# Altium PCB Solar MPPT Charge Controller.PcbDoc
Units mil, origin at the board's own origin, x right, y up, seen from the top; angles counter-clockwise.
Board outline 6000 x 4000 mil, 2 copper layers (Top Layer, Bottom Layer); 83 components, 52 nets, 234 pads, 6 vias.
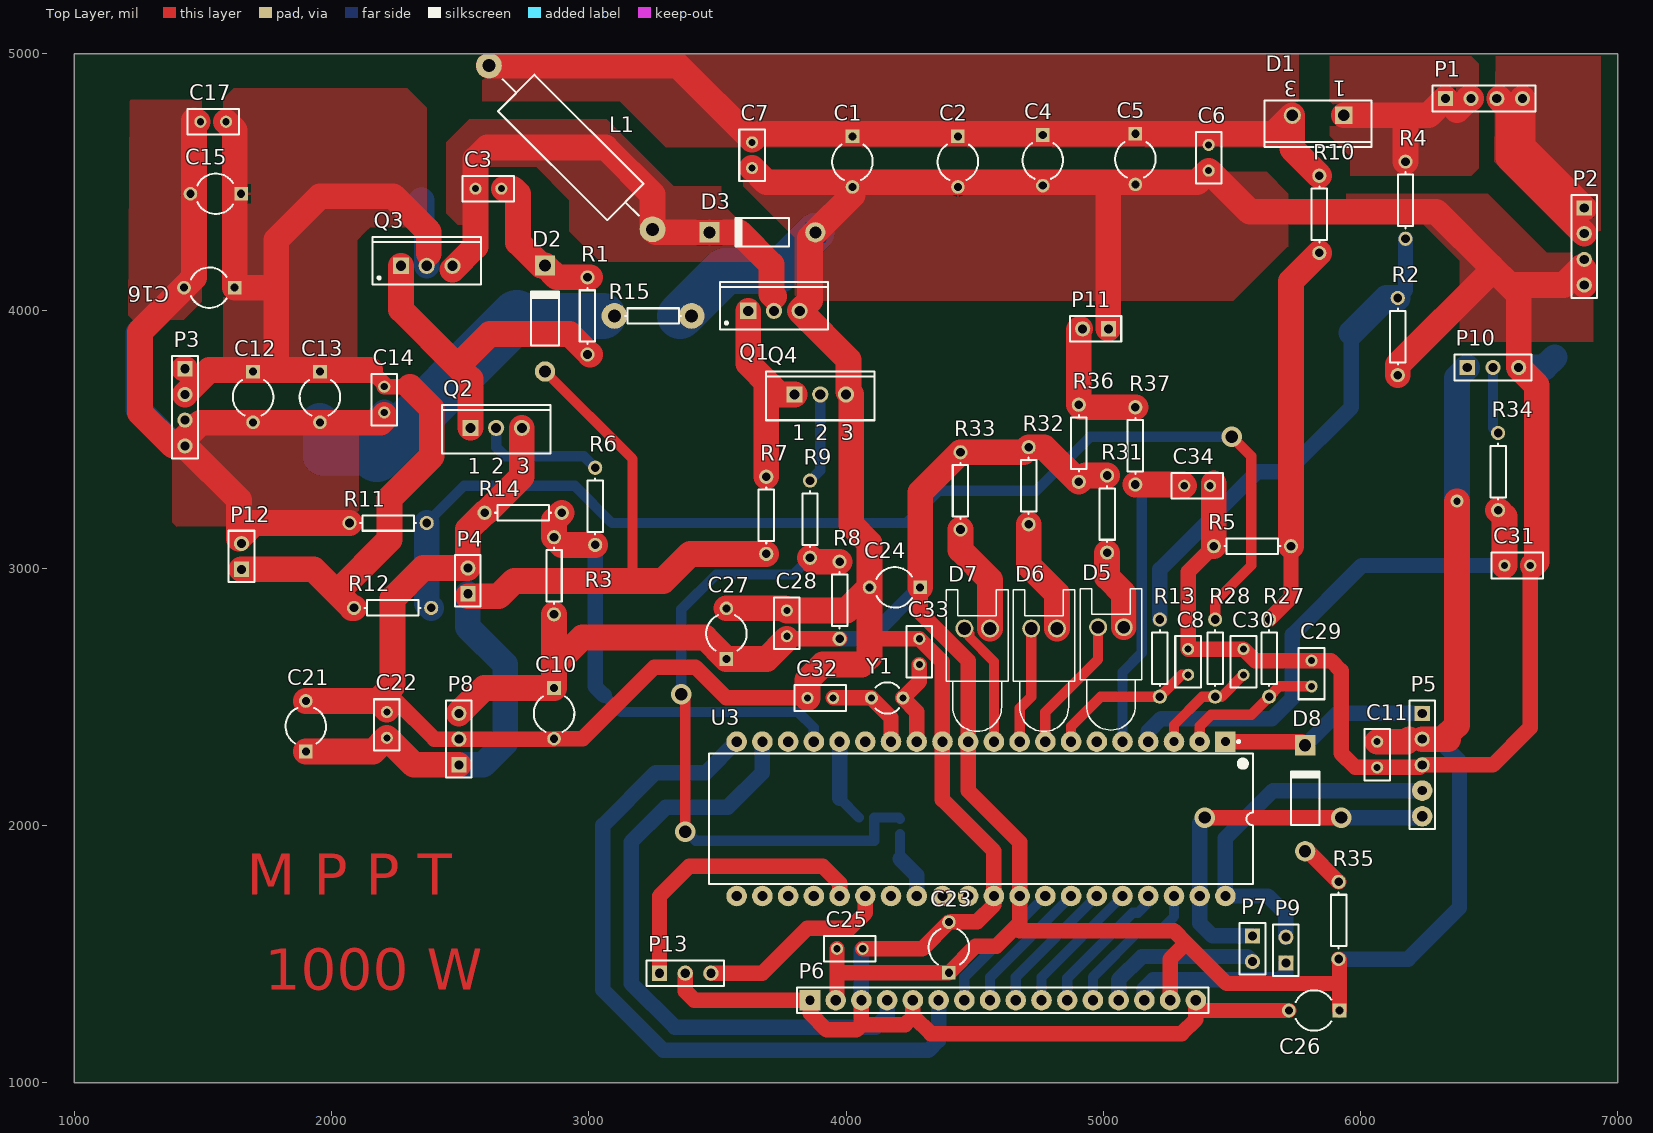
[diagram p0: Top Layer view]
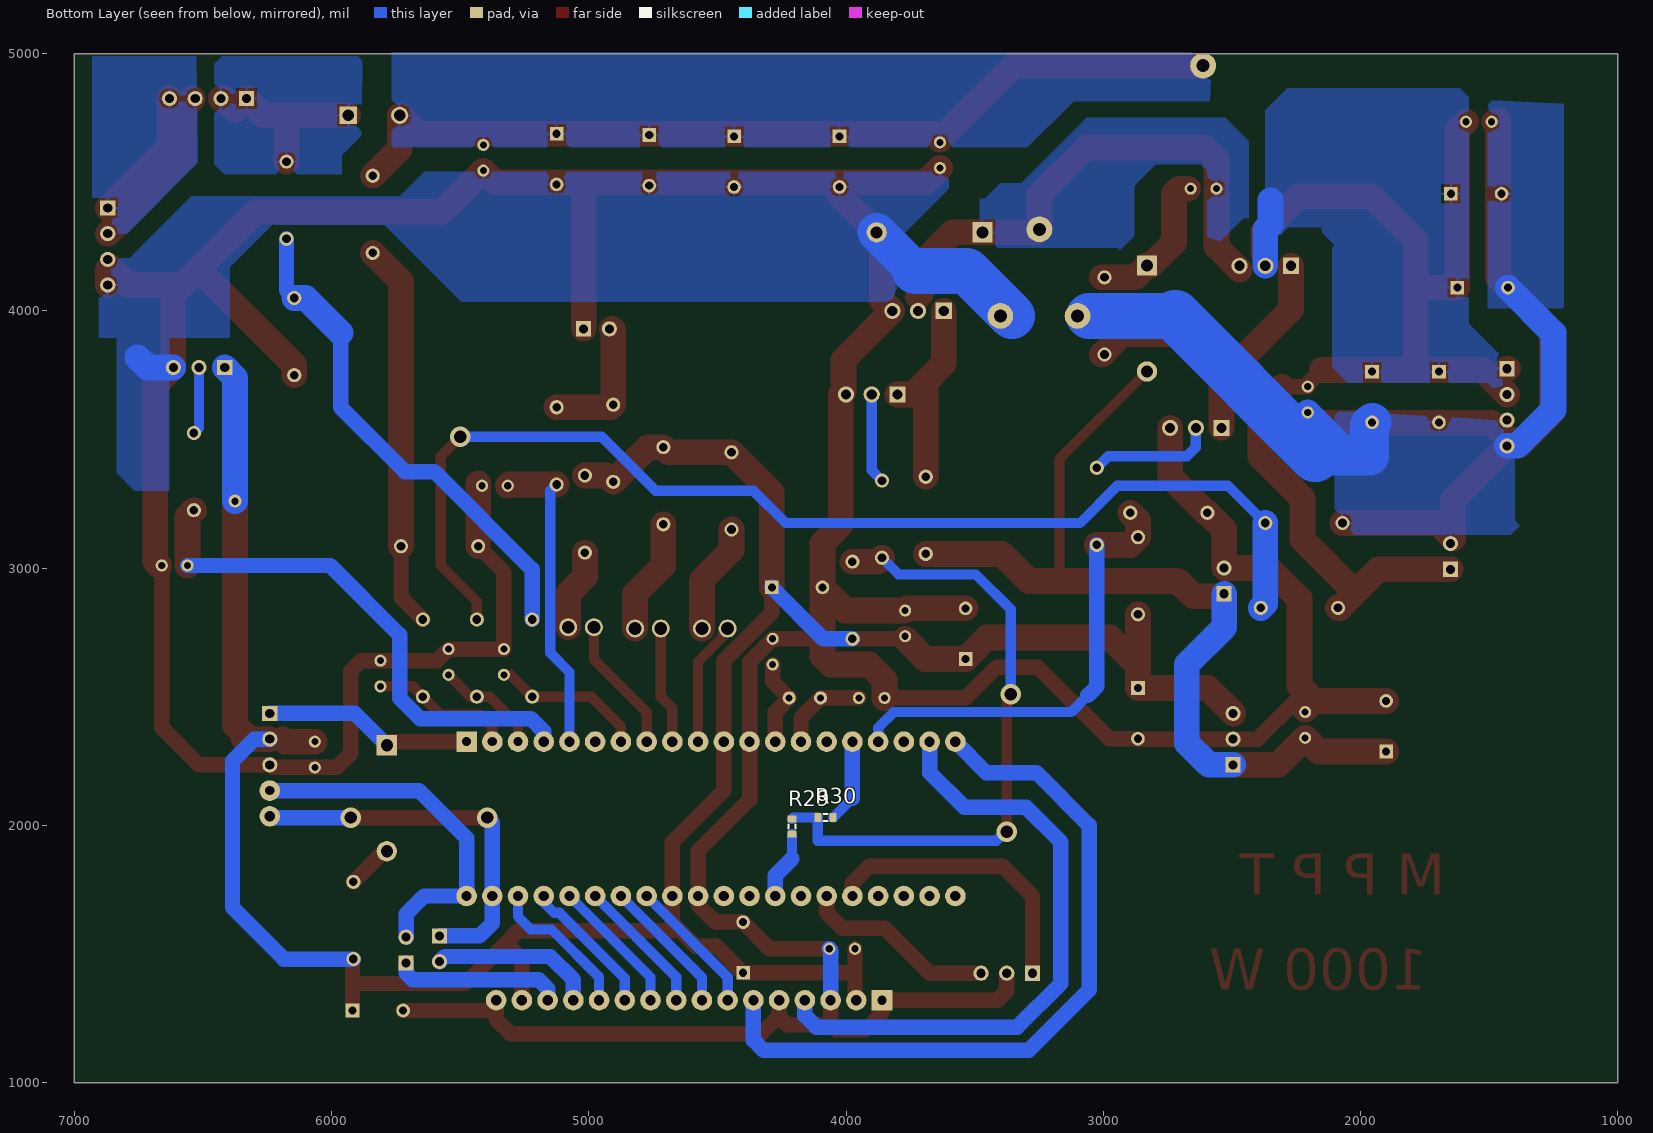
[diagram p1: Bottom Layer view, seen from below]

## Layer stack, top to bottom
Top Solder: solder mask 0.4, Solder Resist, Dk 3.5
Top Layer: signal copper 1.4
Dielectric 1: dielectric 12.6, FR-4, Dk 4.8
Bottom Layer: signal copper 1.4
Bottom Solder: solder mask 0.4, Solder Resist, Dk 3.5

## Board outline
1000,1000 7000,1000 7000,5000 1000,5000

## Design rules (kind name [scope] priority, off if disabled: settings)
Clearance [All] p1: gap=10
PolygonConnect [All] p1: connectstyle=Relief reliefconductorwidth=10 reliefentries=4 polygonreliefangle="90 Angle" airgapwidth=10
RoutingVias [All] p1: holewidth=28 width=50 viastyle="Through Hole" minholewidth=28 minwidth=50 maxholewidth=28 maxwidth=50
SolderMaskExpansion [All] p1: expansion=4
Width [All] p1: maxlimit=200 minlimit=10 preferedwidth=100 minimp=50.000000 maximp=50.000000 favimp=50.000000
29 further rules are at their usual default settings.

## Classes and differential pairs
component class BUCK_Converter: C1 C2 C3 C4 C5 C6 C7 D1 D2 D3 L1 Q1 Q2 Q3 Q4 R1 R2 R3 R4 R5 R6 R7 R8 R9 R10 R14
component class Controller: C8 C23 C24 C25 C26 C27 C28 C29 C30 C31 C32 C33 C34 D5 D6 D7 D8 P5 P6 P7 P9 P10 P11 P13 R13 R27 R28 R29 R30 R31 R32 R33 R34 R35 R36 R37 U3 Y1
component class Main: P1 P2 P3 R11 R12
component class POWER: C10 C11 C12 C13 C14 C15 C16 C17 C21 C22 P4 P8 P12 R15

## Components (designator, comment, footprint, x,y, rotation, side; value= is the part's Value field where it differs from the comment)
C1 "Cap2" CAPR5-4X5 4025,4580 r270 top
C2 "Cap2" CAPR5-4X5 4435,4580 r270 top
C3 "Cap" RAD-0.1 2610,4475 r0 top
C4 "Cap2" CAPR5-4X5 4765,4585 r270 top
C5 "Cap2" CAPR5-4X5 5125,4590 r270 top
C6 "Cap" RAD-0.1 5410,4595 r90 top
C7 "Cap" RAD-0.1 3635,4605 r90 top
C8 "Cap" RAD-0.1 5330,2635 r90 top
C10 "Cap2" CAPR5-4X5 2865,2435 r270 top
C11 "Cap" RAD-0.1 6065,2275 r90 top
C12 "Cap2" CAPR5-4X5 1695,3665 r270 top
C13 "Cap2" CAPR5-4X5 1955,3665 r270 top
C14 "Cap" RAD-0.1 2205,3655 r90 top
C15 "Cap2" CAPR5-4X5 1550,4455 r180 top
C16 "Cap2" CAPR5-4X5 1525,4090 r180 top
C17 "Cap" RAD-0.1 1540,4735 r0 top
C21 "Cap2" CAPR5-4X5 1900,2385 r90 top
C22 "Cap" RAD-0.1 2215,2390 r270 top
C23 "Cap2" CAPR5-4X5 4400,1525 r90 top
C24 "Cap2" CAPR5-4X5 4190,2925 r180 top
C25 "Cap" RAD-0.1 4015,1520 r180 top
C26 "Cap2" CAPR5-4X5 5820,1280 r180 top
C27 "Cap2" CAPR5-4X5 3535,2745 r90 top
C28 "Cap" RAD-0.1 3770,2785 r270 top
C29 "Cap" RAD-0.1 5810,2590 r270 top
C30 "Cap" RAD-0.1 5545,2635 r90 top
C31 "Cap" RAD-0.1 6610,3010 r0 top
C32 "Cap" RAD-0.1 3900,2495 r0 top
C33 "Cap" RAD-0.1 4285,2675 r270 top
C34 "Cap" RAD-0.1 5365,3320 r180 top
D1 "Diode 10TQ045" TO-220AC 5835,4760 r180 top
D2 "Diode 11DQ03" DO-204AL 2830,3970 r90 top
D3 "Diode 11DQ03" DO-204AL 3675,4305 r180 top
D5 "LED0" LED-0 5030,2770 r0 top
D6 "LED0" LED-0 4770,2765 r0 top
D7 "LED0" LED-0 4510,2765 r0 top
D8 "Diode 11DQ03" DO-204AL 5785,2105 r90 top
L1 "Inductor Iron" AXIAL-0.9 2930,4635 r135 top
P1 "Current Sensor" HDR1X4 6330,4825 r0 top
P2 "Header 4" HDR1X4 6870,4400 r270 top
P3 "Header 4" HDR1X4 1430,3775 r270 top
P4 "AdapterOutput" HDR1X2 2530,2900 r90 top
P5 "ICSP" HDR1X5 6240,2435 r270 top
P6 "LCD" HDR1X16 3860,1320 r0 top
P7 "Header 2" HDR1X2 5580,1570 r270 top
P8 "LM7805" HDR1X3 2495,2235 r90 top
P9 "Header 2" HDR1X2 5710,1465 r90 top
P10 "CURRENT" HDR1X3 6415,3780 r0 top
P11 "Header 2" HDR1X2 5020,3930 r180 top
P12 "AdapterInput" HDR1X2 1650,2995 r90 top
P13 "UART" HDR1X3 3275,1425 r0 top
Q1 "IRF3808" TO-220AB 3720,4000 r0 top
Q2 "NPN" TO-220-AB 2640,3545 r0 top
Q3 "IRF3808" TO-220AB 2370,4175 r0 top
Q4 "NPN" TO-220-AB 3900,3675 r0 top
R1 "Res1" AXIAL-0.3#1 2995,3980 r90 top
R2 "Res1" AXIAL-0.3#1 6145,3900 r90 top
R3 "Res1" AXIAL-0.3#1 2865,2970 r270 top
R4 "Res1" AXIAL-0.3#1 6175,4430 r270 top
R5 "Res1" AXIAL-0.3#1 5580,3085 r0 top
R6 "Res1" AXIAL-0.3#1 3025,3240 r270 top
R7 "Res1" AXIAL-0.3#1 3690,3205 r270 top
R8 "Res1" AXIAL-0.3#1 3975,2875 r270 top
R9 "Res1" AXIAL-0.3#1 3860,3190 r270 top
R10 "Res1" AXIAL-0.3#1 5840,4375 r270 top
R11 "Res1" AXIAL-0.3#1 2220,3175 r180 top
R12 "Res1" AXIAL-0.3#1 2237.44,2845 r180 top
R13 "Res1" AXIAL-0.3#1 5220,2650 r90 top
R14 "Res1" AXIAL-0.3#1 2745,3215 r0 top
R15 "Res1" AXIAL-0.3#2 3250,3980 r0 top
R27 "Res1" AXIAL-0.3#1 5645,2650 r90 top
R28 "Res1" AXIAL-0.3#1 5435,2650 r90 top
R29 "Res3" J1-0603 4210,1995 r270 bottom
R30 "Res3" J1-0603 4080,2030 r0 bottom
R31 "Res1" AXIAL-0.3#1 5015,3210 r90 top
R32 "Res1" AXIAL-0.3#1 4710,3320 r90 top
R33 "Res1" AXIAL-0.3#1 4445,3300 r90 top
R34 "Res1" AXIAL-0.3#1 6535,3375 r270 top
R35 "Res1" AXIAL-0.3#1 5915,1630 r90 top
R36 "Res1" AXIAL-0.3#1 4905,3485 r90 top
R37 "Res1" AXIAL-0.3#1 5125,3475 r90 top
U3 "PIC16F887-I/P" PDIP600-P40 4525,2025 r270 top
Y1 "20MHz" R38 4160,2495 r90 top

## Footprints (in the part's own frame and the unit in brackets; to place one, negate y for a bottom-side part, rotate by r counter-clockwise, add the part's x,y. Pads: shape width x height; smd on the part's side, far side on the other; paste and mask are expansions set on the pad)
AXIAL-0.3#1 [mm] "Axial Device, Thru-Hole; 2 Leads; 0.3 in Pin Spacing"
  round 1.4 hole 0.85: 1(-3.81,0) 2(3.81,0)
  silkscreen extent -2.77,-0.76 2.77,0.76
AXIAL-0.3#2 [mm] "Axial Device, Thru-Hole; 2 Leads; 0.3 in Pin Spacing"
  round 2.54 hole 1.27: 1(-3.81,0) 2(3.81,0)
  silkscreen extent -2.77,-0.76 2.77,0.76
AXIAL-0.9 [mil] "Axial Device, Thru-Hole; 2 Leads; 0.9 in Pin Spacing"
  round 100 hole 50: 1(-450,0) 2(450,0)
  silkscreen extent -375,-100 375,100
CAPR5-4X5 [mm] "Capacitor; 2 Leads"
  rect 1.35x1.35 hole 0.8: 1(-2.5,0)
  round 1.35 hole 0.8: 2(2.5,0)
  silkscreen extent -1.69,-2 1.82,2
DO-204AL [mm] "Diode, Axial; Body 5.2 x 2.7 mm (LxDia. max), Lead Dia. 0.86 mm (max)"
  round 2 hole 1.2: 1(-5.23,0)
  rect 2x2 hole 1.2: 2(5.23,0)
  silkscreen extent -2.65,-1.4 2.75,1.4
HDR1X2 [mm] "Connector; Header; 2 Position"
  rect 1.5x1.5 hole 0.9: 1(0,0)
  round 1.5 hole 0.9: 2(2.54,0)
  silkscreen extent -1.27,-1.27 3.81,1.27
HDR1X3 [mm] "Connector; Header; 3 Position"
  rect 1.5x1.5 hole 0.9: 1(0,0)
  round 1.5 hole 0.9: 2(2.54,0) 3(5.08,0)
  silkscreen extent -1.27,-1.27 6.35,1.27
HDR1X4 [mm] "Connector; Header; 4 Position"
  rect 1.5x1.5 hole 0.9: 1(0,0)
  round 1.5 hole 0.9: 2(2.54,0) 3(5.08,0) 4(7.62,0)
  silkscreen extent -1.27,-1.27 8.89,1.27
HDR1X5 [mm] "Connector; Header; 5 Position"
  rect 1.5x1.5 hole 0.9: 1(0,0)
  round 1.5 hole 0.9: 2(2.54,0) 3(5.08,0)
  round 2.032 hole 0.9: 4(7.62,0)
  round 2.032 hole 1.016: 5(10.16,0)
  silkscreen extent -1.27,-1.27 11.43,1.27
HDR1X16 [mil] "Connector; Header; 16 Position"
  rect 80x80 hole 35.43: 1(0,0)
  round 80 hole 40: 2(100,0) 3(200,0) 4(300,0) 5(400,0) 6(500,0) 7(600,0) 8(700,0) 9(800,0) 10(900,0) 11(1000,0) 12(1100,0) 13(1200,0) 14(1300,0) 15(1400,0) 16(1500,0)
  silkscreen extent -50,-50 1550,50
J1-0603 [mm] "Chip Resistor, Body 1.6x0.8mm, IPC High Density"
  rect 0.7x0.9 smd: 1(-0.75,0) 2(0.75,0)
  silkscreen extent -0.2,-0.35 0.2,0.35, body extent -0.85,-0.48 0.85,0.48, height 0.9
LED-0 [mil] "LED; 2 Leads"
  round 70 hole 50: 1(50,0) 2(-50,0)
  silkscreen extent -120,-400 120,150
PDIP600-P40 [mil] "DIP, 40-Leads, Row Spacing 15.24mm, Pitch 2.54mm, Body 51.8x13.5mm"
  rect 80.06x80.06 hole 35.43: 1(-300,950)
  oval 80x80.06 hole 35.43: 2(-300,850)
  round 80 hole 35.43: 3(-300,750)
  round 80 hole 40: 4(-300,650) 6(-300,450) 7(-300,350) 8(-300,250) 9(-300,150) 10(-300,50) 11(-300,-50) 12(-300,-150) 13(-300,-250) 14(-300,-350) 15(-300,-450) 16(-300,-550) 17(-300,-650) 18(-300,-750) 19(-300,-850) 20(-300,-950) 21(300,-950) 22(300,-850) 23(300,-750) 24(300,-650) 25(300,-550) 26(300,-450) 27(300,-350) 28(300,-250) 29(300,-150) 30(300,-50) 31(300,50) 32(300,150) 33(300,250) 34(300,350) 35(300,450) 36(300,550) 37(300,650) 38(300,750) 39(300,850) 40(300,950)
  oval 80.06x80 hole 40: 5(-300,550)
  silkscreen extent -305,-1057 254,1057, body extent -287,-1057 287,1057, height 250
R38 [mm] "Crystal, Thru-Hole; 2 Leads; Body 3.1 x 8.2 mm (Dia.xH)"
  round 1.3 hole 0.7: 1(0,1.55) 2(0,-1.55)
  silkscreen extent -1.55,-1.19 1.55,1.17
RAD-0.1 [mm] "Radial Cap, Thru-Hole; 2 Leads; 0.1 in Pin Spacing"
  round 1.2 hole 0.7: 1(-1.27,0) 2(1.27,0)
  silkscreen extent -2.54,-1.27 2.54,1.27
TO-220-AB [mm] "TO, Thru-Hole, Vertical, Heatsink Mounted; 3 In-Line Leads; Pitch 2.54 mm"
  rect 1.6x1.6 hole 1: 1(-2.54,0)
  round 1.6 hole 1: 2(0,0) 3(2.54,0)
  silkscreen extent -5.35,-2.55 5.35,2.25
TO-220AB [mm] "TO, Thru-Hole, Vertical, Heatsink Mounted; 3 In-Line Leads; Pitch 2.54 mm"
  rect 1.6x1.6 hole 1: 1(-2.54,0)
  round 1.6 hole 1: 2(0,0) 3(2.54,0)
  silkscreen extent -5.35,-1.85 5.35,2.85, body extent -5.4,-1.9 5.4,2.9, height 19.3
TO-220AC [mm] "TO, Thru-Hole, Vertical, Heatsink Mounted; 3 In-Line Leads (1 Absent); Pitch 2.54 mm"
  rect 1.7x1.7 hole 1.1: 1(-2.54,0)
  round 1.7 hole 1.1: 3(2.54,0)
  silkscreen extent -5.3,-1.45 5.3,3.15

## Part data
C1 C2 C3 C4 C5 C6 C7 C8 C10 C11 C12 C13 C14 C15 C16 C17 C21 C22 C23 C24 C25 C26 C27 C28 C29 C30 C31 C32 C33 C34: "Capacitor"
D1 D2 D3 D8: "Schottky Rectifier"
D5 D6 D7: "Typical INFRARED GaAs LED"
L1: "Magnetic-Core Inductor"
P1: library part "Header 4", "Header, 4-Pin"
P2 P3: "Header, 4-Pin"
P4 P12: library part "Header 2", "Header, 2-Pin"
P5: library part "Header 5", "Header, 5-Pin"
P6: library part "Header 16", "Header, 16-Pin"
P7 P9 P11: "Header, 2-Pin"
P8 P10 P13: library part "Header 3", "Header, 3-Pin"
Q1 Q3: library part NMOS-2, "N-Channel Power MOSFET"
Q2 Q4: "NPN Bipolar Transistor"
R1 R2 R3 R4 R5 R6 R7 R8 R9 R10 R11 R12 R13 R14 R15 R27 R28 R29 R30 R31 R32 R33 R34 R35 R36 R37: "Resistor"
U3: "Flash-Based, 8-Bit CMOS Microcontroller with nanoWatt Technology, 8K (x14-Bit words) Program Memory, 624 Bytes Data Memory, 35 I/O pins, 40-Pin PDIP, Standard VDD Range, Industrial Temperature"
Y1: library part XTAL, "Crystal Oscillator"

## Via types
v1: diameter 80, hole 48, Top Layer to Bottom Layer, 5 vias
v2: diameter 50, hole 28, Top Layer to Bottom Layer, 1 vias

## Nets (pads, with @x,y where several pads share a name; then routed paths per layer and width w, separated by ;. In a path a pad name is that pad's centre, name@x,y a point inside that pad or via, vN(x,y) a via of type N, cw(c..) or ccw(c..) an arc to the next point about the centre after c; other vN are vias at no path point)
5V: C10.1 C11.2 C23.1 C24.1 C25.2 C26.1 C27.1 C28.2 P5.2 P6.2 P6.15 P8.3 P10.1 R3.2 R8.2 R31.2 R32.2 R33.2 R35.1 R36.1 U3.11 U3.32 | length 10829.1
  Top Layer w60: C28.2 3780,2725 R8.2 ; P6.2 3965,1325 3965,1425 ; C25.2 3965,1425 ; C24.1 4288.43,2826.57 4475,2640 U3.11 4475,2135 4675,1935 U3.32 4675,1590 5275,1590 5322.5,1542.5 ; 4675,1620 4585,1530 4503.43,1530 C23.1 3966.57,1426.57 3965,1425 ; P6.15 5260,1480 5322.5,1542.5 ; R35.1 5918.43,1476.57 5918.43,1385 ; C26.1 5918.43,1385 ; 5322.5,1542.5 5480,1385 5918.43,1385
  Top Layer w100: P8.3 2593.43,2533.43 C10.1 2865,2620 ; R3.2 2865,2620 ; C28.2@3770,2725 3691.57,2646.57 C27.1 3451.57,2730 2975,2730 2865,2620 ; C24.1 4288.43,3293.43 R33.2 4690,3450 R32.2 4770,3470 R36.1 4930,3360 R31.2 ; C11.2 6180,2325 6190,2335 ; P5.2 6340,2335 6340,2355 6375,2390 v2(6375,3260)
  Bottom Layer w60: R8.2 4088.43,2725 C24.1 ; R35.1 6185,1480 6385,1680 6385,2250 6300,2335 P5.2
  Bottom Layer w100: v2(6375,3260) 6375,3740 P10.1
12VOUT: C21.1 C22.2 D2.1 P4.1 P8.1 R7.2 | length 3701.2
  Top Layer w40: D2.1 3170,3424.09 3170,2955 3175,2950
  Top Layer w100: C21.1 2161.57,2286.57 C22.2 2320,2235 P8.1 ; P4.1@2530,2890 2650,2890 2710,2950 3175,2950 3290,2950 3395,3055 R7.2
  Bottom Layer w100: P8.1 2590,2235 2675,2320 2675,2625 2530,2770 P4.1
B_VFB: C8.1 R13.1 U3.7 | length 597.8
  Top Layer w40: U3.7 4875,2385 4990,2500 R13.1 5305,2585 C8.1
D0: P6.7 U3.33 | length 535.5
  Bottom Layer w40: P6.7 4460,1410 U3.33
D1: P6.8 U3.34 | length 535.5
  Bottom Layer w40: P6.8 4560,1410 U3.34
D2: P6.9 U3.35 | length 535.5
  Bottom Layer w40: P6.9 4660,1410 U3.35
D3: P6.10 U3.36 | length 535.5
  Bottom Layer w40: P6.10 4760,1410 U3.36
D4: P6.11 U3.37 | length 547.2
  Bottom Layer w40: P6.11 4860,1405 5115,1660 5135,1660 5175,1700 U3.37
D5: P6.12 U3.38 | length 582.3
  Bottom Layer w40: P6.12 4960,1410 5145,1595 5225,1595 5275,1645 U3.38
D6: P6.13 P7.2 | length 645.6
  Bottom Layer w60: P6.13 5060,1400 5150,1490 5560,1490 P7.2
D7: P6.14 P9.1 | length 659.9
  Bottom Layer w60: P6.14 5160,1365 5195,1400 5685,1400 5710,1425 P9.1
E: P6.6 U3.20 | length 2868.5
  Bottom Layer w60: U3.20 3455,2205 3260,2205 3055,2000 3055,1360 3290,1125 4320,1125 4360,1165 P6.6
GND: C1.2 C2.2 C4.2 C5.2 C6.1 C7.1 C8.2 C10.2 C11.1 C21.2 C22.1 C23.2 C24.2 C25.1 C26.2 C27.2 C28.1 C29.1 C30.2 C31.2 C32.1 C33.1 C34.1 D3.1 P2.3 P2.4 P4.2 P5.3 P6.1 P6.3 P6.5 P6.16 P8.2 P10.3 P11.1 P13.2 Q1.3 Q2.3 Q4.3 R2.1 R5.1 R14.1 R15.2 U3.12 U3.31 | length 21520
  Top Layer w60: 2181.57,2483.43 2251.57,2483.43 2400,2335 P8.2 2863.43,2335 C10.2 2976.57,2336.57 3255,2615 3415,2615 3535,2495 C32.1 ; P13.2 3375,1355 3410,1320 P6.1 3860,1270 3925,1205 4040,1205 4060,1225 ; P6.3 4060,1225 ; C25.1 4296.57,1520 C23.2 ; 4091.57,2738.43 4105,2725 C33.1 4375,2635 U3.12 4375,2100 4575,1900 U3.31 4575,1690 4510,1625 C23.2@4410,1625 ; P6.5 4260,1255 ; R5.1 5330,2985 C8.2 C30.2 5590,2640 C29.1 5885,2640 5925,2600 5925,2280 5980,2225 C11.1 6230,2225 P5.3 6515,2235 6660,2380 C31.2 ; C26.2 5362.5,1280 5360,1282.5 5360,1245 5305,1190 4330,1190 4265,1255 4260,1255 ; 4060,1225 4230,1225 4260,1255
  Top Layer w100: C22.1@2215,2450 2181.57,2483.43 C21.2 2178.43,2483.43 2237.44,2542.44 2237.44,2881.27 2356.17,3000 P4.2 2530,3150 R14.1 2600,3215 2740,3355 Q2.3 ; C27.2 3761.57,2843.43 C28.1 4001.57,2835 C24.2 ; C7.1 3690,4500 5010,4500 ; C32.1 3850,2565 3910,2625 4060,2625 4091.57,2656.57 C24.2 ; C1.2 4025,4449.09 D3.1 3860,4284.09 3860,4040 Q1.3 4010,3810 4010,3685 4020,3675 4020,3168.43 4091.57,3096.85 C24.2 ; P11.1 5020,4490 5010,4500 ; R5.1 C34.1@5430,3330 ; R2.1 6145,3790 6507.5,4152.5 6507.5,4172.5 ; C31.2@6670,3010 6685,3025 6685,3710 P10.3 6615,4065 6580,4100 ; P2.4 6870,4160 6860,4170 6790,4100 6580,4100 ; 5010,4500 5365,4500 C6.1 5570,4385 6295,4385 6507.5,4172.5 ; 6507.5,4172.5 6580,4100
  Bottom Layer w60: P6.3 4060,1515 C25.1
  Bottom Layer w100: P10.3 6715,3780 6755,3820
  Bottom Layer w150: 3730.91,4155 D3.1
  Bottom Layer w180: R15.2@3355,3980 3530,4155 3730.91,4155
I_VFB: C30.1 R28.1 U3.3 | length 415.8
  Top Layer w40: U3.3 5275,2390 5385,2500 R28.1 5460,2500 C30.1
L_G: R8.1 R9.2 R29.1 R30.2 | length 2517.7
  Top Layer w40: v1(3360,2510) 3375,2495 v1(3375,1975)
  Top Layer w100: R9.2 3875,3025 R8.1
  Bottom Layer w40: v1(3360,2510) 3360,2840 3495,2975 3795,2975 R9.2 ; v1(3375,1975) 3380,1975 3415.47,1939.53 4109.53,1939.53 R30.2 4204.53,2030 R29.1
MCLR: D8.2 P5.1 U3.1 | length 822.2
  Top Layer w60: U3.1 5770.91,2325 D8.2
  Bottom Layer w60: D8.2 5909.09,2435 P5.1
NetC1_1: C1.1 C2.1 C4.1 C5.1 C6.2 C7.2 D1.3 L1.2 R10.1 | length 3560.4
  Top Layer w100: L1.2 3346.8,4953.2 3635,4665 3658.43,4688.43 C5.1 5663.43,4688.43 D1.3 5735,4630 R10.1
NetC3_1: C3.1 D3.2 L1.1 Q1.2 Q3.3 | length 2032
  Top Layer w100: Q3.3@2470,4160 2560,4250 C3.1 2560,4590 2605,4635 3065,4635 3248.2,4451.8 L1.1 3260,4305 D3.2 3585,4305 3710,4180 3710,4065.56 3720,4055.56
NetC3_2: C3.2 D2.2 R1.2 | length 588.7
  Top Layer w100: C3.2@2670,4475 2705,4475 2725,4455 2725,4265.91 2815,4175.91 D2.2 2875.91,4130 R1.2@3005,4130
NetD1_1: D1.1 P1.1 P1.2 R4.1 | length 681.8
  Top Layer w100: D1.1 6160,4760 ; R4.1 6175,4745 6160,4760 ; P1.1 6265,4760 6160,4760 ; 6375,4780 6420,4825 P1.2
NetD5_1: D5.1 R31.1 | length 316.9
  Top Layer w100: R31.1 5015,2965 5080,2900 D5.1
NetD5_2: D5.2 U3.8 | length 529.9
  Top Layer w40: U3.8 4775,2440 4980,2645 D5.2
NetD6_1: D6.1 R32.1 | length 450.6
  Top Layer w100: R32.1 4710,3010 4820,2900 D6.1
NetD6_2: D6.2 U3.9 | length 458.6
  Top Layer w40: U3.9 4675,2455 4720,2500 D6.2
NetD7_1: D7.1 R33.1 | length 432.6
  Top Layer w100: R33.1 4445,3070 4560,2955 D7.1
NetD7_2: D7.2 U3.10 | length 487.6
  Top Layer w40: D7.2 4480,2745 4480,2731.86 4575,2636.86 U3.10
NetD8_1: D8.1 R35.2 | length 179.3
  Top Layer w60: D8.1 5795.91,1899.09 R35.2
NetP1_3: P1.3 P1.4 P2.1 P2.2 | length 1186.1
  Top Layer w100: P1.3@6540,4825 6575,4790 6575,4595 P2.2 ; P1.4 6630,4640 P2.1
NetP10_2: P10.2 R34.1 | length 263.3
  Bottom Layer w40: P10.2 6515,3545 R34.1
NetP11_2: P11.2 R36.2 R37.2 | length 521.2
  Top Layer w100: P11.2@4910,3930 4905,3925 R36.2 4915,3625 R37.2
NetP13_1: P13.1 U3.25 | length 1124.6
  Top Layer w60: P13.1 3275,1725 3390,1840 3910,1840 3975,1775 U3.25
NetP13_3: P13.3 U3.26 | length 762.3
  Top Layer w60: P13.3 3675,1425 3850,1600 4015,1600 4075,1660 U3.26
NetQ1_1: Q1.1 Q4.1 R7.1 | length 798.8
  Top Layer w100: Q1.1 3620,3795 3700,3715 ; R7.1 3690,3705 3700,3715 ; Q4.1 3740,3675 3700,3715
NetQ2_1: Q2.1 Q3.1 R1.1 | length 1341.8
  Top Layer w100: Q3.1 2270,4005 2490,3785 ; Q2.1 2540,3735 2490,3785 ; R1.1@3005,3830 2925,3910 2615,3910 2490,3785
NetQ2_2: Q2.2 R6.1 | length 493.1
  Bottom Layer w40: Q2.2 2640,3470 2675,3435 2980,3435 R6.1
NetQ4_2: Q4.2 R9.1 | length 351.6
  Bottom Layer w40: R9.1 3900,3380 Q4.2
NetR2_2: R2.2 R4.2 R13.2 | length 1969.3
  Bottom Layer w60: R13.2 5220,2995 5600,3375 5715,3375 5965,3625 5965,3915 ; R2.2 6175,4080 R4.2
  Bottom Layer w100: 5965,3915 6100,4050 R2.2
NetR3_1: R3.1 R6.2 R14.2 U3.17 | length 1801.1
  Top Layer w100: R14.2 2865,3185 R3.1 2895,3090 R6.2
  Bottom Layer w40: 3060,2505 3125,2440 3815,2440 3875,2380 U3.17
  Bottom Layer w60: R6.2 3025,2540 3060,2505
NetR5_2: R5.2 R10.2 R27.2 | length 1505.8
  Top Layer w60: R27.2 5730,2885 R5.2
  Top Layer w100: R5.2 5730,4115 R10.2
NetR11_1: R11.1 R12.1 R28.2 | length 4525.2
  Top Layer w40: R28.2 5435,2870 5575,3010 5575,3435 v1(5500,3510)
  Bottom Layer w40: R11.1 2515,3320 2945,3320 3090,3175 4235,3175 4360,3300 4740,3300 4950,3510 v1(5500,3510)
  Bottom Layer w100: R11.1 2370,2862.44 R12.1
NetR29_2: R29.2 U3.28 | length 267.4
  Bottom Layer w40: 4210,1870 R29.2
  Bottom Layer w60: 4210,1870 4275,1805 U3.28
NetR30_1: R30.1 U3.16 | length 326.3
  Bottom Layer w40: 3975,2105.47 R30.1
  Bottom Layer w60: 3975,2105.47 U3.16
O_CURRENT_FB: C31.1 R34.2 U3.4 | length 2061.4
  Top Layer w100: R34.2 6560,3200 C31.1
  Bottom Layer w60: U3.4 5175,2365 5225,2415 5655.54,2415 5735,2494.46 5735,2740 6005,3010 C31.1
O_VFB: C29.2 R27.1 U3.2 | length 559.2
  Top Layer w40: U3.2 5375,2385 5420,2430 5575,2430 R27.1 5685,2540 C29.2
OSC1: C32.2 U3.14 Y1.1 | length 350.5
  Top Layer w60: C32.2 Y1.1 4175,2418.98 U3.14
OSC2: C33.2 U3.13 Y1.2 | length 348.9
  Top Layer w60: U3.13 4275,2441.02 Y1.2 4285,2558.98 C33.2
PGC: P5.5 P7.1 U3.39 | length 1491.1
  Top Layer w60: v1(5395,2030) v1(5925,2030)
  Bottom Layer w60: v1(5395,2030) 5375,2010 U3.39 5375,1620 5425,1570 P7.1 ; v1(5925,2030) 6235,2030 P5.5
PGD: P5.4 P9.2 U3.40 | length 1420.6
  Bottom Layer w60: P9.2 5710,1655 5640,1725 U3.40 5475,1950 5660,2135 P5.4
PV+: C12.1 C13.1 C14.2 C15.1 C16.1 C17.2 P3.1 P3.2 P12.1 Q3.2 R12.2 | length 4835.3
  Top Layer w60: 2150,3770 2205,3715 C14.2 2305,3705
  Top Layer w100: P3.1@1425,3775 P3.1 ; P3.2 1525,3770 1785,3770 ; C17.2 1623.43,4701.57 C16.1 1780,4090 1785,4085 ; P12.1 1930,2995 2020,2905 ; R12.2 2080,2845 2020,2905 ; 2150,3770 1785,3770 ; 2305,3705 2390,3620 2390,3435 2225,3270 2225,3110 2020,2905 ; 2377.5,4223.06 2377.5,4307.5 2240,4445 1955,4445 1785,4275 1785,4085 ; 1785,3770 1785,4085
  Bottom Layer w100: 2350,4430 2350,4335 2370,4315 Q3.2
PV-: C12.2 C13.2 C14.1 C15.2 C16.2 C17.1 P3.3 P3.4 P12.2 R11.2 R15.1 | length 5680.2
  Top Layer w100: C17.1@1480,4735 1470,4735 1465,4740 1465,4128.43 C16.2 1255,3918.43 1255,3605 1385,3475 P3.4 ; R11.2 1700,3175 1640,3115 1640,3265 P3.4 ; C14.1@2205,3595 2205,3580 2190,3565 1490,3565 1430,3505 P3.4
  Bottom Layer w100: C16.2 1250,3913.43 1250,3615 1390,3475 P3.4 ; 2080,3435 2080,3480 C14.1
  Bottom Layer w150: C13.2 1965,3556.57 1965,3435 2080,3435 2175,3435
  Bottom Layer w180: 2720,3980 R15.1@3055,3980
  Bottom Layer w200: 2175,3435 2720,3980
RS: P6.4 U3.19 | length 2435.9
  Bottom Layer w60: U3.19 3675,2205 3540,2070 3300,2070 3165,1935 3165,1385 3335,1215 4115,1215 4160,1260 P6.4
TEMP: C34.2 R37.1 U3.5 | length 1233.5
  Top Layer w100: R37.1 5310,3325 C34.2
  Bottom Layer w40: U3.5 5075,2595 5150,2670 5150,3300 R37.1
pads on no net: U3.6 U3.15 U3.18 U3.21 U3.22 U3.23 U3.24 U3.27 U3.29 U3.30

## Polygon pours and split planes (outlines as drawn)
NetC3_1 on Top Layer "Top Layer-No Net" (solid, pour order 30): 3755,4180 3515,4420 3515,4485 3330,4485 3235,4580 3070,4745 2565,4745 2535,4745 2490,4700 2445,4655 2445,4575 2445,4380 2465,4360 2490,4335 2575,4335 2600,4360 2600,4560 2795,4560 2915,4440 2925,4430 2925,4315 2925,4310 2995,4240 3045,4190 3665,4190
PV- on Top Layer "Top Layer-No Net" (solid, pour order 28): 1215,4815 1220,4820 1495,4820 1495,4035 1485,4025 1425,3965 1210,3965
PV- on Top Layer "Top Layer-No Net" (solid, pour order 22): 2110,3165 2105,3170 2105,3610 1485,3610 1430,3555 1380,3505 1380,3475 1380,3160
PV+ on Top Layer "Top Layer-No Net" (solid, pour order 20): 2110,3725 2095,3740 1580,3740 1580,4825 1615,4860 1620,4865 2180,4865 2295,4865 2370,4790 2370,4325 2150,4325 2130,4305 2100,4275 2100,3770
NetP1_3 on Top Layer "Top Layer-No Net" (solid, pour order 16): 6525,4990 6935,4990 6935,4300 6915,4280 6905,4270 6825,4270 6825,4275 6520,4580
NetD1_1 on Top Layer "Top Layer-No Net" (solid, pour order 14): 5880,4990 6430,4990 6460,4960 6460,4560 6460,4555 6430,4525 5960,4525 5960,4600 5955,4605 5880,4680 5880,4685
GND on Top Layer "Top Layer-No Net" (solid, pour order 8): 5945,4455 6495,4455 6685,4265 6725,4225 6905,4225 6905,3880 6910,3875 6905,3880 6385,3880 6385,4195 6230,4350 5945,4350
GND on Top Layer "Top Layer-No Net" (solid, pour order 6): 3595,4550 3605,4540 5630,4540 5635,4540 5720,4455 5720,4250 5715,4250 5590,4125 5505,4040 3890,4040 3820,4040 3810,4050 3800,4060 3800,4285 3600,4485
NetC1_1 on Top Layer "Top Layer-No Net" (solid, remove dead copper, pour order 2): 2585,5005 2590,5000 5760,5000 5760,4635 5765,4630 5760,4635 3625,4635 3300,4635 3120,4815 2585,4815
GND on Bottom Layer "Top Layer-No Net" (solid, pour order 36): 6610,3915 6630,3895 6630,3300 6765,3300 6770,3305 6835,3370 6835,3905
PV+ on Bottom Layer "Top Layer-No Net" (solid, pour order 34): 2370,4295 2370,4780 2360,4790 2285,4865 2280,4865 1615,4865 1580,4830 1580,4110 1580,3950 1490,3860 1400,3770 1380,3770 1380,3735 1450,3665 1505,3720 1555,3720 2050,3720 2085,3755 2110,3780 2110,3830 2110,4245 2100,4255 2150,4305 2150,4325 2280,4325 2310,4295
NetC3_1 on Bottom Layer "Top Layer-No Net" (solid, pour order 32): 2590,4285 2595,4290 2595,4550 2600,4550 2620,4570 2750,4570 2795,4570 2875,4490 2880,4485 2880,4305 2880,4290 2935,4235 2945,4245 3380,4245 3410,4245 3495,4330 3480,4345 3480,4435 3460,4435 3415,4480 3400,4495 3315,4495 3315,4500 3065,4750 2530,4750 2525,4750 2435,4660 2435,4360 2455,4360 2545,4270
PV- on Bottom Layer "Top Layer-No Net" (solid, pour order 26): 1505,4820 1505,4010 1205,4010 1200,4005 1210,4015 1210,4805
PV- on Bottom Layer "Top Layer-No Net" (solid, pour order 24): 2100,3610 2100,3165 2065,3130 1505,3130 1415,3130 1380,3165 1400,3185 1400,3575
NetP1_3 on Bottom Layer "Top Layer-No Net" (solid, pour order 18): 6525,4990 6935,4990 6930,4985 6930,4300 6795,4300 6520,4575
NetD1_1 on Bottom Layer "Top Layer-No Net" (solid, pour order 12): 5880,4990 6425,4990 6450,4965 6455,4960 6455,4575 6455,4570 6420,4535 6415,4530 5960,4530 5960,4605 5885,4680
GND on Bottom Layer "Top Layer-No Net" (solid, pour order 10): 3595,4545 3600,4540 5635,4540 5640,4540 5720,4460 5735,4445 6540,4445 6545,4445 6745,4245 6785,4205 6905,4205 6905,3890 6900,3895 6395,3895 6395,4170 6225,4340 6220,4335 5845,4335 5795,4335 5735,4275 5495,4035 3870,4035 3820,4035 3810,4045 3800,4055 3800,4275 3620,4455 3600,4475 3600,4525
NetC1_1 on Bottom Layer "Top Layer-No Net" (solid, pour order 4): 2580,5005 5765,5005 5765,4640 5760,4635 3310,4635 3295,4635 3130,4800 3115,4815 2585,4815

## Other copper
Top Layer:
  text "M P P T" at 1670,1730 h160
  text "1000 W" at 1740,1360 h160

## Text inside footprints (layer, text, board x,y; h text height)
D1: Top Overlay "1" at 5944.84,4894.84 h59.06 r180; Top Overlay "3" at 5754.69,4894.84 h59.06 r180
Q2: Top Overlay "1" at 2530.16,3366.85 h59.06; Top Overlay "2" at 2620.32,3366.85 h59.06; Top Overlay "3" at 2720.32,3366.85 h59.06
Q4: Top Overlay "1" at 3790.16,3496.85 h59.06; Top Overlay "2" at 3880.32,3496.85 h59.06; Top Overlay "3" at 3980.32,3496.85 h59.06